# Altium PCB praline.PcbDoc (part 2 of 6)
Units mm, origin at the board's own origin, x right, y up, seen from the top; angles counter-clockwise.
Board outline 120 x 75 mm, 6 copper layers (F.Cu, In1.Cu, In2.Cu, In3.Cu, In4.Cu, B.Cu); 576 components, 429 nets, 2806 pads, 953 vias.
Unrouted connection lines stored in the file: 268.
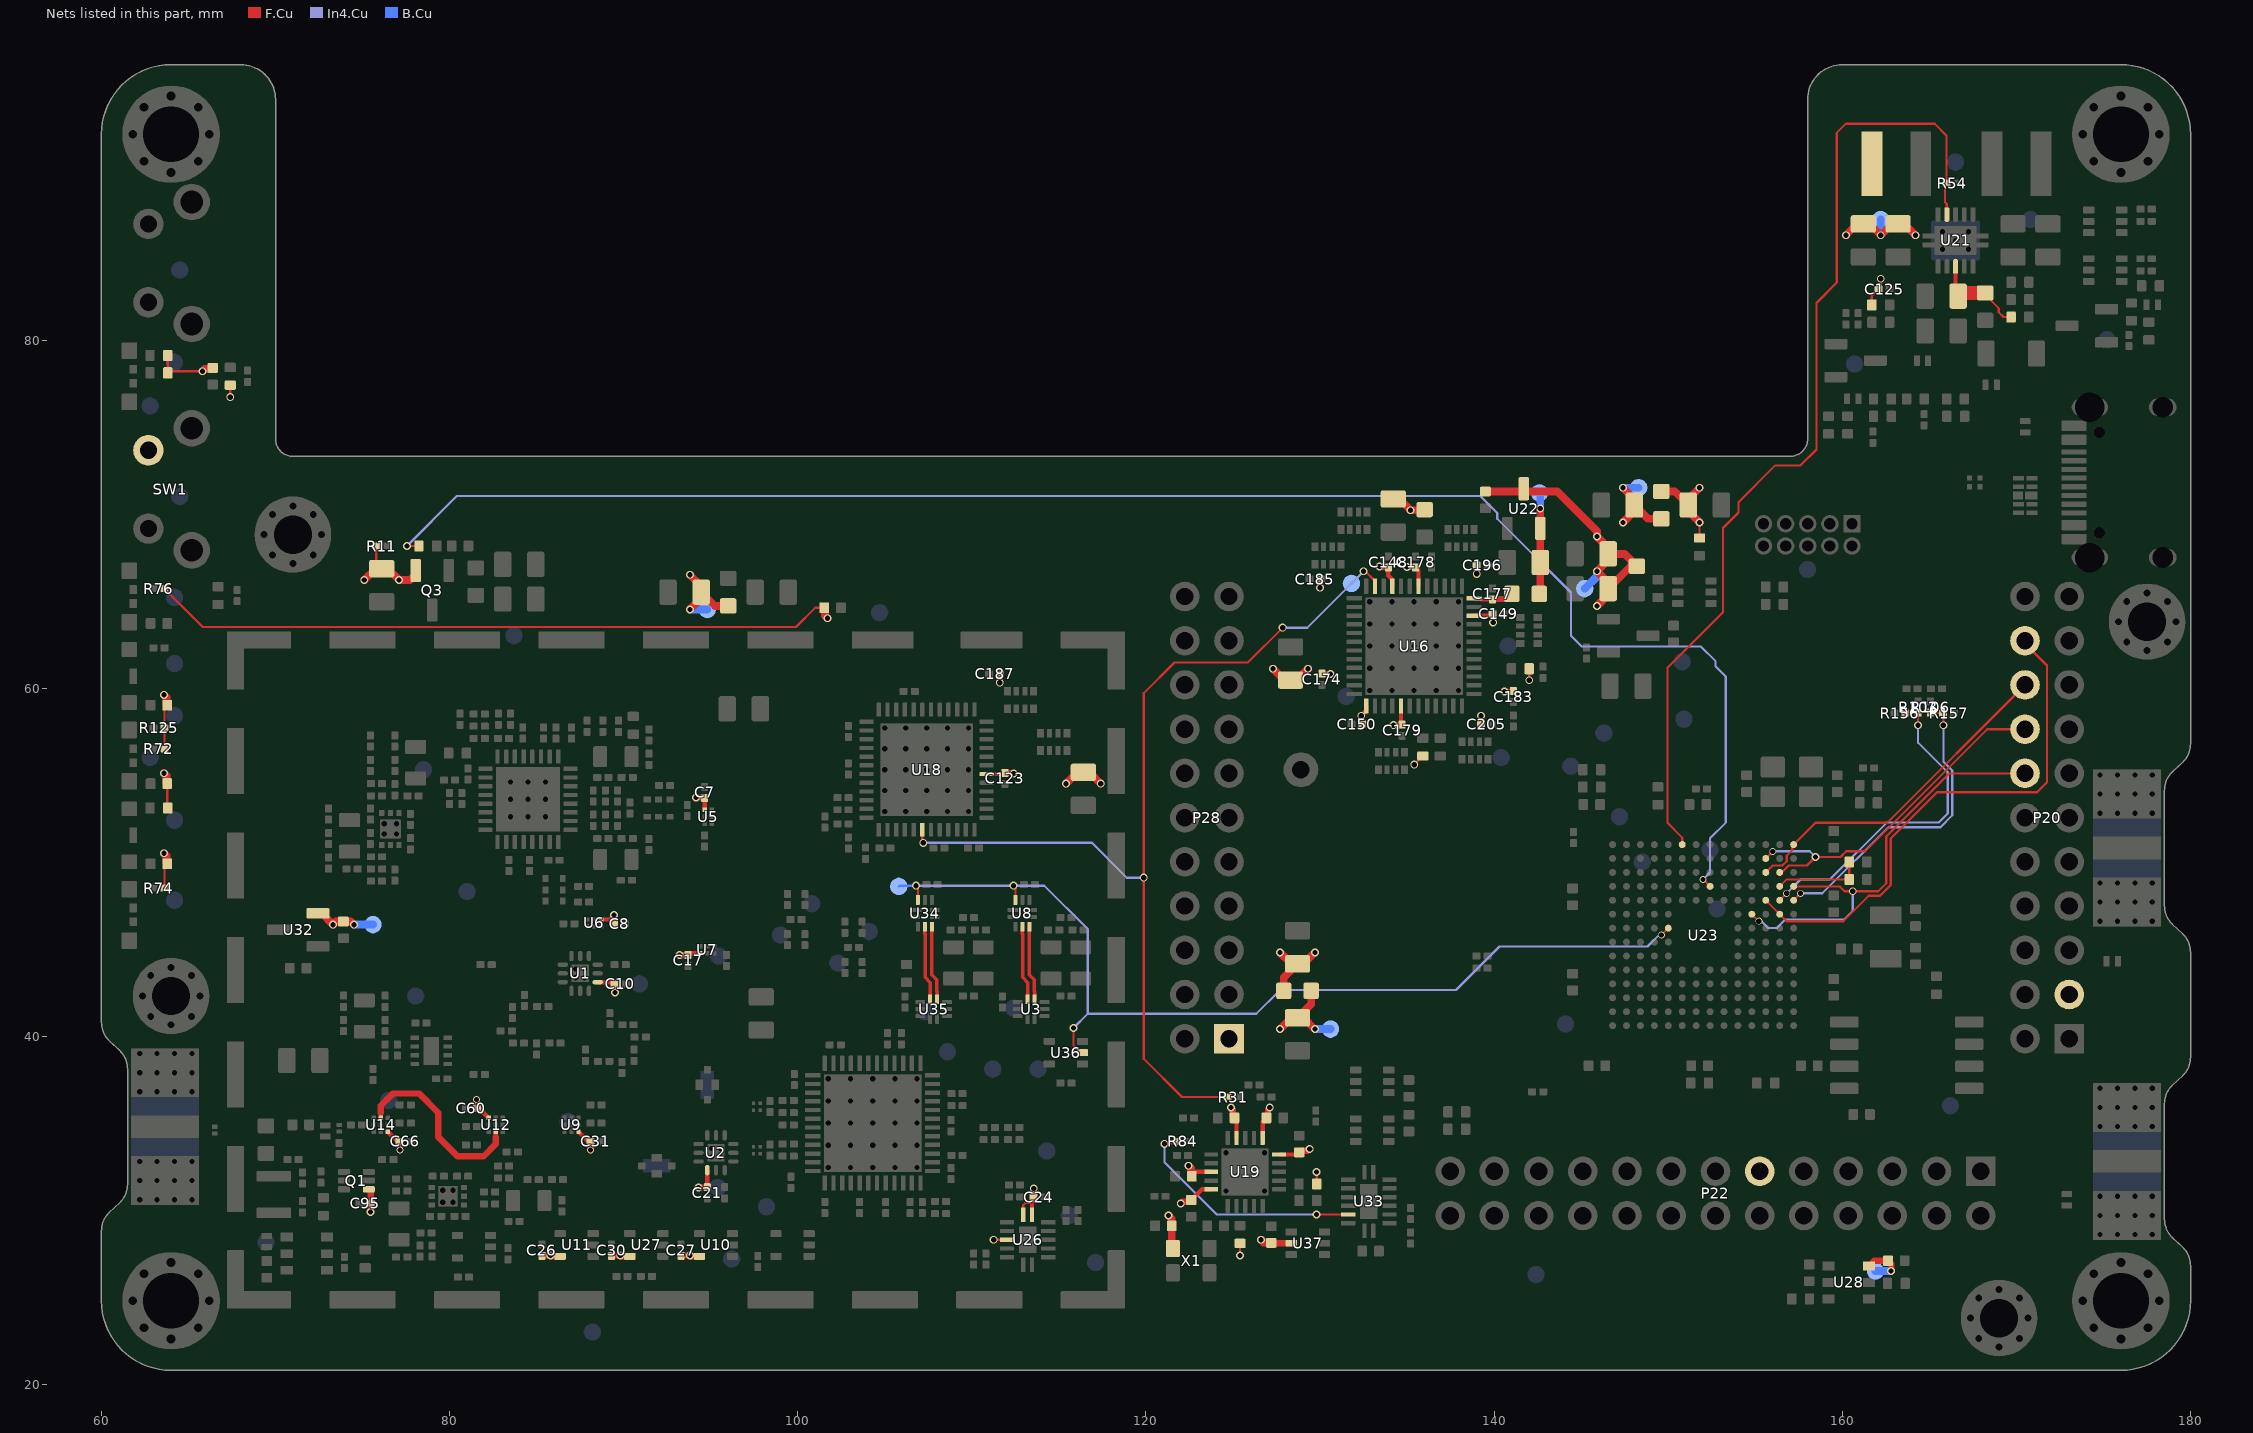
[diagram p6: the nets of this part, all layers, seen from the top]

## Components (designator, comment, footprint, x,y, rotation, side; value= is the part's Value field where it differs from the comment) (continued)
U24 "AP22652" TSOP-6_1.65x3.05mm_P0.95mm 71.8,27.52 r180 top
U25 "TRF37C73" WSON-8-1EP_2x2mm_P0.5mm_EP0.9x1.6mm 78.95,39.17 r180 top
U26 "74HC00" DHVQFN-14-1EP_2.5x3mm_P0.5mm_EP1x1.5mm 113.2,28.32 r0 top
U27 "74LVC1G32" SOT-353_SC-70-5 91.3,28.02 r180 top
U28 "AP22652" TSOP-6_1.65x3.05mm_P0.95mm 160.36,25.87 r0 top
U30 "74LVC1G3157" SOT-363_SC-70-6 133,37.42 r0 top
U31 "74LVC1G3157" SOT-363_SC-70-6 133,34.62 r0 top
U32 "LDO_2V5" SOT-23-3 71.3,46.12 r180 top
U33 "74HC4051" DHVQFN-16-1EP_2.5x3.5mm_P0.5mm_EP1x2mm 132.8,30.52 r180 top
U34 "GT4227" GTIC_UQFN-10_1.4x1.8mm_P0.4mm 107.3,47.07 r0 top
U35 "GT4227" GTIC_UQFN-10_1.4x1.8mm_P0.4mm 107.8,41.57 r90 top
U36 "74LVC1G86" SOT-353_SC-70-5 115.4,39.07 r180 top
U37 "74LVC1G3157" SOT-363_SC-70-6 129.3,28.12 r180 top
U38 "BGB741L7ESD" TSLP-7-1 76.6,51.92 r180 top
U39 "74LVC1G08" SOT-353_SC-70-5 99.7,28.02 r180 top
U40 "BGB741L7ESD" TSLP-7-1 79.9,30.82 r270 top
X1 "TCXO" Oscillator_SMD_SeikoEpson_TG2520SMN-xxx-xxxxxx-4Pin_2.5x2.0mm 122.6,27.12 r90 top
X2 "MCU_XTAL" Crystal_SMD_3225-4Pin_3.2x2.5mm 157.1,54.62 r270 top
X3 "RTC_XTAL" Crystal_SMD_3215-2Pin_3.2x1.5mm 162.5,45.72 r270 top

## Footprints (in the part's own frame and the unit in brackets; to place one, negate y for a bottom-side part, rotate by r counter-clockwise, add the part's x,y. Pads: shape width x height; smd on the part's side, far side on the other; paste and mask are expansions set on the pad)
Anaren_0805_2012Metric-6 [mm]
  rect 0.33x0.41 smd mask+0.05: 1(-0.495,0.65) 2(-0.495,0) 3(-0.495,-0.65) 4(0.495,-0.65) 5(0.495,0) 6(0.495,0.65)
  silkscreen extent -1.04,-1.12 0.64,1.4
Balun_TDK_TFSZ06052460-3310A2X [mm]
  rrect5% 0.18x0.2 smd mask+0.05: 1(-0.19,0.2) 2(-0.19,-0.2) 3(0.19,-0.2) 4(0.19,0.2)
  silkscreen extent -0.65,0.05 -0.45,0.45
C_0201_0603Metric [mm]
  rrect25% 0.46x0.4 smd paste-0.46 mask+0.05: 1(-0.32,0) 2(0.32,0)
  rrect25% 0.318x0.36 on Top Paste mask-0.36: Un1(-0.345,0) Un2(0.345,0)
C_0402_1005Metric [mm]
  rrect25% 0.56x0.62 smd mask+0.05: 1(-0.48,0) 2(0.48,0)
  silkscreen extent -0.11,-0.36 0.11,0.36
C_0805_2012Metric [mm]
  rrect25% 1x1.45 smd mask+0.05: 1(-0.95,0) 2(0.95,0)
  silkscreen extent -0.26,-0.73 0.26,0.73
Crystal_SMD_3215-2Pin_3.2x1.5mm [mm]
  rect 1x1.8 smd mask+0.05: 1(-1.25,0) 2(1.25,0)
  silkscreen extent -0.6,-0.87 0.6,0.87
Crystal_SMD_3225-4Pin_3.2x2.5mm [mm]
  rrect21% 1.2x1.4 smd mask+0.05: 1(-0.85,1.1) 2(-0.85,-1.1) 3(0.85,-1.1) 4(0.85,1.1)
  silkscreen extent -1.85,-0.25 1.4,1.8
D_SOD-123FL [mm]
  rrect25% 1x1.5 smd mask+0.05: 1(-1.45,0) 2(1.45,0)
  silkscreen extent -2.2,-1 1.65,1
DHVQFN-14-1EP_2.5x3mm_P0.5mm_EP1x1.5mm [mm]
  rrect25% 0.25x0.825 smd mask+0.05: 1(-0.25,1.438) 7(-0.25,-1.438) 8(0.25,-1.438) 14(0.25,1.438)
  rrect25% 0.825x0.25 smd mask+0.05: 2(-1.188,1) 3(-1.188,0.5) 4(-1.188,0) 5(-1.188,-0.5) 6(-1.188,-1) 9(1.188,-1) 10(1.188,-0.5) 11(1.188,0) 12(1.188,0.5) 13(1.188,1)
  rect 1x1.5 smd paste-1.5 mask+0.05: 15(0,0)
  rrect25% 0.81x1.21 on Top Paste mask-1.21: Un1(0,0)
  silkscreen extent -1.6,-1.61 1.36,1.94
DHVQFN-16-1EP_2.5x3.5mm_P0.5mm_EP1x2mm [mm]
  rrect25% 0.25x0.825 smd mask+0.05: 1(-0.25,1.687) 8(-0.25,-1.687) 9(0.25,-1.687) 16(0.25,1.687)
  rrect25% 0.825x0.25 smd mask+0.05: 2(-1.188,1.25) 3(-1.188,0.75) 4(-1.188,0.25) 5(-1.188,-0.25) 6(-1.188,-0.75) 7(-1.188,-1.25) 10(1.188,-1.25) 11(1.188,-0.75) 12(1.188,-0.25) 13(1.188,0.25) 14(1.188,0.75) 15(1.188,1.25)
  rect 1x2 smd paste-2 mask+0.05: 17(0,0)
  rrect25% 0.81x0.81 on Top Paste mask-0.81: Un1(0,0.5) Un2(0,-0.5)
  silkscreen extent -1.6,-1.86 1.36,2.19
Diodes_UDFN-10_1.0x2.5mm_P0.5mm [mm]
  rect 0.625x0.25 smd mask+0.05: 1(-0.387,1) 2(-0.387,0.5) 4(-0.387,-0.5) 5(-0.387,-1) 6(0.387,-1) 7(0.387,-0.5) 9(0.387,0.5) 10(0.387,1)
  rect 0.7x0.45 smd mask+0.05: 3(-0.35,0)
  rect 0.575x0.45 smd mask+0.05: 8(0.413,0)
  silkscreen extent -1.17,-1.36 0.5,1.59
Filter_Pulse_BPF1608LM09R5000A [mm]
  rrect12% 0.425x0.4 smd mask+0.05: 1(-0.863,0) 3(0.863,0)
  rect 1.6x0.8 smd far side paste-1.6 mask-1.6: 2(0,0)
  rrect12% 0.6x0.425 smd mask+0.05: 2(0,-0.463) 4(0,0.463)
  silkscreen extent -1.33,-0.93 0.9,0.5
GTIC_UQFN-10_1.4x1.8mm_P0.4mm [mm]
  rrect25% 0.663x0.225 smd mask+0.05: 1(-0.519,0.2)
  rrect25% 0.563x0.225 smd mask+0.05: 2(-0.569,-0.2) 6(0.569,-0.2) 7(0.569,0.2)
  rrect25% 0.225x0.563 smd mask+0.05: 3(-0.4,-0.768) 4(0,-0.768) 5(0.4,-0.768) 8(0.4,0.768) 9(0,0.768) 10(-0.4,0.768)
  silkscreen extent -1.14,-1.01 0.81,1.34
L_0201_0603Metric [mm]
  rrect25% 0.46x0.4 smd paste-0.46 mask+0.05: 1(-0.32,0) 2(0.32,0)
  rrect25% 0.318x0.36 on Top Paste mask-0.36: Un1(-0.345,0) Un2(0.345,0)
L_0603_1608Metric [mm]
  rrect25% 0.875x0.95 smd mask+0.05: 1(-0.787,0) 2(0.787,0)
  silkscreen extent -0.16,-0.51 0.16,0.51
L_CommonModeChoke_Murata_DLM0NS [mm]
  rrect5% 0.3x0.3 smd mask+0.05: 1(-0.3,0.25) 2(0.3,0.25) 3(-0.3,-0.25) 4(0.3,-0.25)
  silkscreen extent -0.85,-0.53 0.33,0.55
L_Taiyo-Yuden_A251818 [mm]
  rrect20% 0.6x2 smd mask+0.05: 1(-1.05,0) 2(1.05,0)
  silkscreen extent -0.55,-1 0.55,1
L_Taiyo-Yuden_NR-40xx [mm]
  rect 1.2x3.7 smd mask+0.05: 1(-1.4,0) 2(1.4,0)
  silkscreen extent -2,-2.1 2,2.1
L_TDK_MLZ2012_h1.25mm [mm]
  rrect20% 0.8x1.2 smd mask+0.05: 1(-0.9,0) 2(0.9,0)
  silkscreen extent -0.35,-0.7 0.35,0.7
Laird_Technologies_BMI-S-230-F_50.8x38.1mm [mm]
  rrect12% 1x3.35 smd mask+0.05: 1(-25.3,-17.775) 1(-25.3,17.775) 1(25.3,-17.775) 1(25.3,17.775)
  rrect12% 1x3.8 smd mask+0.05: 1(-25.3,-12) 1(-25.3,-6) 1(-25.3,0) 1(-25.3,6) 1(-25.3,12) 1(25.3,-12) 1(25.3,-6) 1(25.3,0) 1(25.3,6) 1(25.3,12)
  rrect12% 3.7x1 smd mask+0.05: 1(-23.95,-18.95) 1(-23.95,18.95) 1(23.95,-18.95) 1(23.95,18.95)
  rrect12% 3.8x1 smd mask+0.05: 1(-18,-18.95) 1(-18,18.95) 1(-12,-18.95) 1(-12,18.95) 1(-6,-18.95) 1(-6,18.95) 1(0,-18.95) 1(0,18.95) 1(6,-18.95) 1(6,18.95) 1(12,-18.95) 1(18,-18.95)
  rrect12% 3.55x1 smd mask+0.05: 1(11.875,18.95) 1(18.125,18.95)
  silkscreen extent -25.75,-19.2 25.55,20.05
LED_Dual_Xinglight_XL-3210_Horizontal [mm]
  rrect12% 0.5x0.44 smd mask+0.05: 1(0.4,-0.55) 2(-0.4,-0.55)
  rrect12% 0.95x0.88 smd mask+0.05: 3(1.475,-0.33) 4(-1.475,-0.33)
  silkscreen extent -2.15,-0.97 1.15,1.13
LED_Single_Xinglight_XL-3210_Horizontal [mm]
  rrect12% 0.85x0.88 smd mask+0.05: 1(-1.525,-0.33) 2(1.525,-0.33)
  rrect12% 0.9x0.44 smd mask+0.05: Un1(0,-0.55)
  silkscreen extent -2.15,-0.97 1.15,1.13
MountingHole_2.2mm_M2_Pad_Via [mm]
  round 0.7 hole 0.4 mask+0.05: 1(-1.65,0) 1(-1.167,-1.167) 1(-1.167,1.167) 1(0,-1.65) 1(0,1.65) 1(1.167,-1.167) 1(1.167,1.167) 1(1.65,0)
  round 4.4 hole 2.2 mask+0.05: 1(0,0)
MountingHole_3.2mm_M3_Pad_Via [mm]
  round 0.8 hole 0.5 mask+0.05: 1(-2.2,0) 1(-1.556,-1.556) 1(-1.556,1.556) 1(0,-2.2) 1(0,2.2) 1(1.556,-1.556) 1(1.556,1.556) 1(2.2,0)
  round 5.6 hole 3.2 mask+0.05: 1(0,0)
MXD8638C [mm]
  rrect12% 0.25x0.25 smd mask+0.05: 1(-0.4,0.4) 2(-0.4,0) 3(-0.4,-0.4) 4(0,-0.4) 5(0.4,-0.4) 6(0.4,0) 7(0.4,0.4) 8(0,0.4) 9(0,0)
  silkscreen extent -0.9,-0.65 0.65,0.7
Oscillator_SMD_SeikoEpson_TG2520SMN-xxx-xxxxxx-4Pin_2.5x2.0mm [mm]
  rrect25% 1x0.8 smd mask+0.05: 1(-0.7,1.05) 2(-0.7,-1.05) 3(0.7,-1.05) 4(0.7,1.05)
  silkscreen extent -1.6,-0.32 1.11,1.25
PinHeader_2x05_P1.27mm_Vertical [mm]
  rect 1x1 hole 0.65 mask+0.05: 1(0,0)
  round 1 hole 0.65 mask+0.05: 2(1.27,0) 3(0,-1.27) 4(1.27,-1.27) 5(0,-2.54) 6(1.27,-2.54) 7(0,-3.81) 8(1.27,-3.81) 9(0,-5.08) 10(1.27,-5.08)
  silkscreen extent -1.18,-5.82 2.45,0.81
PinSocket_2x11_P2.54mm_Vertical_Flipped [mm]
  rect 1.7x1.7 hole 1 mask+0.05: 1(0,0)
  round 1.7 hole 1 mask+0.05: 2(2.54,0) 3(0,-2.54) 4(2.54,-2.54) 5(0,-5.08) 6(2.54,-5.08) 7(0,-7.62) 8(2.54,-7.62) 9(0,-10.16) 10(2.54,-10.16) 11(0,-12.7) 12(2.54,-12.7) 13(0,-15.24) 14(2.54,-15.24) 15(0,-17.78) 16(2.54,-17.78) 17(0,-20.32) 18(2.54,-20.32) 19(0,-22.86) 20(2.54,-22.86) 21(0,-25.4) 22(2.54,-25.4)
  silkscreen extent -1.33,-26.73 3.87,1.33
PinSocket_2x13_P2.54mm_Vertical_Flipped [mm]
  rect 1.7x1.7 hole 1 mask+0.05: 1(0,0)
  round 1.7 hole 1 mask+0.05: 2(2.54,0) 3(0,-2.54) 4(2.54,-2.54) 5(0,-5.08) 6(2.54,-5.08) 7(0,-7.62) 8(2.54,-7.62) 9(0,-10.16) 10(2.54,-10.16) 11(0,-12.7) 12(2.54,-12.7) 13(0,-15.24) 14(2.54,-15.24) 15(0,-17.78) 16(2.54,-17.78) 17(0,-20.32) 18(2.54,-20.32) 19(0,-22.86) 20(2.54,-22.86) 21(0,-25.4) 22(2.54,-25.4) 23(0,-27.94) 24(2.54,-27.94) 25(0,-30.48) 26(2.54,-30.48)
  silkscreen extent -1.33,-31.81 3.87,1.33
QFN-12-1EP_2x2mm_P0.5mm_EP1x1mm [mm]
  rrect100% 0.6x0.25 smd mask+0.05: 1(-1,0.5) 2(-1,0) 3(-1,-0.5) 7(1,-0.5) 8(1,0) 9(1,0.5)
  rrect100% 0.25x0.6 smd mask+0.05: 4(-0.5,-1) 5(0,-1) 6(0.5,-1) 10(0.5,1) 11(0,1) 12(-0.5,1)
  round 0.4 hole 0.3 mask+0.05: 13(-0.25,0.25) 13(-0.25,-0.25) 13(0.25,0.25) 13(0.25,-0.25)
  rect 1x1 smd mask+0.05: 13(0,0)
  silkscreen extent -1.35,-1.1 1.1,1.2
QFN-20-1EP_4x4mm_P0.5mm_EP2.7x2.7mm_ThermalVias [mm]
  rrect25% 0.8x0.25 smd mask+0.05: 1(-1.95,1) 2(-1.95,0.5) 3(-1.95,0) 4(-1.95,-0.5) 5(-1.95,-1) 11(1.95,-1) 12(1.95,-0.5) 13(1.95,0) 14(1.95,0.5) 15(1.95,1)
  rrect25% 0.25x0.8 smd mask+0.05: 6(-1,-1.95) 7(-0.5,-1.95) 8(0,-1.95) 9(0.5,-1.95) 10(1,-1.95) 16(1,1.95) 17(0.5,1.95) 18(0,1.95) 19(-0.5,1.95) 20(-1,1.95)
  round 0.5 hole 0.3 mask+0.05: 21(-1.1,-1.1) 21(-1.1,1.1) 21(1.1,-1.1) 21(1.1,1.1)
  rect 2.7x2.7 smd paste-2.7 mask+0.05: 21(0,0)
  rect 2.7x2.7 smd far side paste-2.7 mask-2.7: 21(0,0)
  rrect21% 1.17x1.17 on Top Paste mask-1.17: Un1(-0.675,0.675) Un2(-0.675,-0.675) Un3(0.675,0.675) Un4(0.675,-0.675)
  silkscreen extent -2.35,-2.11 2.11,2.44
QFN-32-1EP_5x5mm_P0.5mm_EP3.7x3.7mm_ThermalVias [mm]
  rrect25% 0.8x0.25 smd mask+0.05: 1(-2.45,1.75) 2(-2.45,1.25) 3(-2.45,0.75) 4(-2.45,0.25) 5(-2.45,-0.25) 6(-2.45,-0.75) 7(-2.45,-1.25) 8(-2.45,-1.75) 17(2.45,-1.75) 18(2.45,-1.25) 19(2.45,-0.75) 20(2.45,-0.25) 21(2.45,0.25) 22(2.45,0.75) 23(2.45,1.25) 24(2.45,1.75)
  rrect25% 0.25x0.8 smd mask+0.05: 9(-1.75,-2.45) 10(-1.25,-2.45) 11(-0.75,-2.45) 12(-0.25,-2.45) 13(0.25,-2.45) 14(0.75,-2.45) 15(1.25,-2.45) 16(1.75,-2.45) 25(1.75,2.45) 26(1.25,2.45) 27(0.75,2.45) 28(0.25,2.45) 29(-0.25,2.45) 30(-0.75,2.45) 31(-1.25,2.45) 32(-1.75,2.45)
  round 0.5 hole 0.3 mask+0.05: 33(-1,1) 33(-1,0) 33(-1,-1) 33(0,1) 33(0,0) 33(0,-1) 33(1,1) 33(1,0) 33(1,-1)
  rect 3.7x3.7 smd paste-3.7 mask+0.05: 33(0,0)
  rect 2.5x2.5 smd far side paste-2.5 mask-2.5: 33(0,0)
  round 0.602 on Top Paste mask-0.602: Un1(-1.425,1.425) Un4(-1.425,-1.425) Un13(1.425,1.425) Un16(1.425,-1.425)
  round 0.612 on Top Paste mask-0.612: Un2(-1.425,0.5) Un3(-1.425,-0.5) Un5(-0.5,1.425) Un8(-0.5,-1.425) Un9(0.5,1.425) Un12(0.5,-1.425) Un14(1.425,0.5) Un15(1.425,-0.5)
  rrect25% 0.806x0.806 on Top Paste mask-0.806: Un6(-0.5,0.5) Un7(-0.5,-0.5) Un10(0.5,0.5) Un11(0.5,-0.5)
  silkscreen extent -2.85,-2.61 2.61,2.94
QFN-48-1EP_7x7mm_P0.5mm_EP5.3x5.3mm_ThermalVias [mm]
  rrect25% 0.8x0.25 smd mask+0.05: 1(-3.45,2.75) 2(-3.45,2.25) 3(-3.45,1.75) 4(-3.45,1.25) 5(-3.45,0.75) 6(-3.45,0.25) 7(-3.45,-0.25) 8(-3.45,-0.75) 9(-3.45,-1.25) 10(-3.45,-1.75) 11(-3.45,-2.25) 12(-3.45,-2.75) 25(3.45,-2.75) 26(3.45,-2.25) 27(3.45,-1.75) 28(3.45,-1.25) 29(3.45,-0.75) 30(3.45,-0.25) 31(3.45,0.25) 32(3.45,0.75) 33(3.45,1.25) 34(3.45,1.75) 35(3.45,2.25) 36(3.45,2.75)
  rrect25% 0.25x0.8 smd mask+0.05: 13(-2.75,-3.45) 14(-2.25,-3.45) 15(-1.75,-3.45) 16(-1.25,-3.45) 17(-0.75,-3.45) 18(-0.25,-3.45) 19(0.25,-3.45) 20(0.75,-3.45) 21(1.25,-3.45) 22(1.75,-3.45) 23(2.25,-3.45) 24(2.75,-3.45) 37(2.75,3.45) 38(2.25,3.45) 39(1.75,3.45) 40(1.25,3.45) 41(0.75,3.45) 42(0.25,3.45) 43(-0.25,3.45) 44(-0.75,3.45) 45(-1.25,3.45) 46(-1.75,3.45) 47(-2.25,3.45) 48(-2.75,3.45)
  round 0.5 hole 0.3 mask+0.05: 49(-2.4,-2.4) 49(-2.4,-1.2) 49(-2.4,0) 49(-2.4,1.2) 49(-2.4,2.4) 49(-1.2,2.4) 49(-1.2,-1.2) 49(-1.2,0) 49(-1.2,1.2) 49(-1.2,-2.4) 49(0,2.4) 49(0,1.2) 49(0,0) 49(0,-1.2) 49(0,-2.4) 49(1.2,2.4) 49(1.2,-1.2) 49(1.2,0) 49(1.2,1.2) 49(1.2,-2.4) 49(2.4,-2.4) 49(2.4,-1.2) 49(2.4,0) 49(2.4,1.2) 49(2.4,2.4)
  rect 5.3x5.3 smd paste-5.3 mask+0.05: 49(0,0)
  rect 5.3x5.3 smd far side paste-5.3 mask-5.3: 49(0,0)
  rrect24% 1.026x1.026 on Top Paste mask-1.026: Un1(-1.8,1.8) Un2(-1.8,0.6) Un3(-1.8,-0.6) Un4(-1.8,-1.8) Un5(-0.6,1.8) Un6(-0.6,0.6) Un7(-0.6,-0.6) Un8(-0.6,-1.8) Un9(0.6,1.8) Un10(0.6,0.6) Un11(0.6,-0.6) Un12(0.6,-1.8) Un13(1.8,1.8) Un14(1.8,0.6) Un15(1.8,-0.6) Un16(1.8,-1.8)
  silkscreen extent -3.85,-3.61 3.61,3.94
QFN-48-1EP_7x7mm_P0.5mm_EP5.6x5.6mm_ThermalVias [mm]
  rrect25% 0.875x0.25 smd mask+0.05: 1(-3.437,2.75) 2(-3.437,2.25) 3(-3.437,1.75) 4(-3.437,1.25) 5(-3.437,0.75) 6(-3.437,0.25) 7(-3.437,-0.25) 8(-3.437,-0.75) 9(-3.437,-1.25) 10(-3.437,-1.75) 11(-3.437,-2.25) 12(-3.437,-2.75) 25(3.437,-2.75) 26(3.437,-2.25) 27(3.437,-1.75) 28(3.437,-1.25) 29(3.437,-0.75) 30(3.437,-0.25) 31(3.437,0.25) 32(3.437,0.75) 33(3.437,1.25) 34(3.437,1.75) 35(3.437,2.25) 36(3.437,2.75)
  rrect25% 0.25x0.875 smd mask+0.05: 13(-2.75,-3.437) 14(-2.25,-3.437) 15(-1.75,-3.437) 16(-1.25,-3.437) 17(-0.75,-3.437) 18(-0.25,-3.437) 19(0.25,-3.437) 20(0.75,-3.437) 21(1.25,-3.437) 22(1.75,-3.437) 23(2.25,-3.437) 24(2.75,-3.437) 37(2.75,3.437) 38(2.25,3.437) 39(1.75,3.437) 40(1.25,3.437) 41(0.75,3.437) 42(0.25,3.437) 43(-0.25,3.437) 44(-0.75,3.437) 45(-1.25,3.437) 46(-1.75,3.437) 47(-2.25,3.437) 48(-2.75,3.437)
  round 0.5 hole 0.3 mask+0.05: 49(-2.55,-2.55) 49(-2.55,-1.275) 49(-2.55,0) 49(-2.55,1.275) 49(-2.55,2.55) 49(-1.275,2.55) 49(-1.275,-1.275) 49(-1.275,0) 49(-1.275,1.275) 49(-1.275,-2.55) 49(0,2.55) 49(0,1.275) 49(0,0) 49(0,-1.275) 49(0,-2.55) 49(1.275,2.55) 49(1.275,-1.275) 49(1.275,0) 49(1.275,1.275) 49(1.275,-2.55) 49(2.55,-2.55) 49(2.55,-1.275) 49(2.55,0) 49(2.55,1.275) 49(2.55,2.55)
  rect 5.6x5.6 smd paste-5.6 mask+0.05: 49(0,0)
  rect 5.6x5.6 smd far side paste-5.6 mask-5.6: 49(0,0)
  rrect23% 1.084x1.084 on Top Paste mask-1.084: Un1(-1.913,1.913) Un2(-1.913,0.637) Un3(-1.913,-0.637) Un4(-1.913,-1.913) Un5(-0.637,1.913) Un6(-0.637,0.637) Un7(-0.637,-0.637) Un8(-0.637,-1.913) Un9(0.637,1.913) Un10(0.637,0.637) Un11(0.637,-0.637) Un12(0.637,-1.913) Un13(1.913,1.913) Un14(1.913,0.637) Un15(1.913,-0.637) Un16(1.913,-1.913)
  silkscreen extent -3.85,-3.61 3.61,3.94
R_0201_0603Metric [mm]
  rrect25% 0.46x0.4 smd paste-0.46 mask+0.05: 1(-0.32,0) 2(0.32,0)
  rrect25% 0.318x0.36 on Top Paste mask-0.36: Un1(-0.345,0) Un2(0.345,0)
R_0402_1005Metric [mm]
  rrect25% 0.54x0.64 smd mask+0.05: 1(-0.51,0) 2(0.51,0)
  silkscreen extent -0.15,-0.38 0.15,0.38
R_Array_Convex_4x0402 [mm]
  rect 0.5x0.4 smd mask+0.05: 1(-0.5,0.75) 4(-0.5,-0.75) 5(0.5,-0.75) 8(0.5,0.75)
  rect 0.5x0.3 smd mask+0.05: 2(-0.5,0.25) 3(-0.5,-0.25) 6(0.5,-0.25) 7(0.5,0.25)
  silkscreen extent -0.25,-1.18 0.25,1.18
SMA_MyAntenna_A-SMA-KE-16.5A_EdgeMount [mm]
  rect 3.9x1.3 smd paste-3.9 mask+0.05: 1(2.15,0)
  round 0.45 hole 0.3 mask+0.05: 2(0.7,4.2) 2(0.7,3.1) 2(0.7,2) 2(0.7,-2) 2(0.7,-3.1) 2(0.7,-4.2) 2(1.7,2) 2(1.7,3.1) 2(1.7,4.2) 2(1.7,-4.2) 2(1.7,-3.1) 2(1.7,-2) 2(2.7,2) 2(2.7,3.1) 2(2.7,4.2) 2(2.7,-4.2) 2(2.7,-3.1) 2(2.7,-2) 2(3.7,3.1) 2(3.7,4.2) 2(3.7,-2) 2(3.7,2) 2(3.7,-4.2) 2(3.7,-3.1)
  rect 3.9x2.8 smd paste-3.9 mask+0.05: 2(2.15,3.1) 2(2.15,-3.1)
  rect 3.9x2.8 smd far side paste-3.9 mask+0.05: 2(2.15,3.1) 2(2.15,-3.1)
  rect 3.9x9 smd far side paste-9 mask-9: 2(2.15,0)
SOIC-8_5.3x5.3mm_P1.27mm [mm]
  rrect25% 1.625x0.65 smd mask+0.05: 1(-3.588,1.905) 2(-3.588,0.635) 3(-3.588,-0.635) 4(-3.588,-1.905) 5(3.588,-1.905) 6(3.588,-0.635) 7(3.588,0.635) 8(3.588,1.905)
  silkscreen extent -3.76,-2.76 2.76,2.82
SOT-23-3 [mm]
  rrect25% 1.325x0.6 smd mask+0.05: 1(-1.138,0.95) 2(-1.138,-0.95) 3(1.138,0)
  silkscreen extent -1.54,-1.56 0.8,1.84
SOT-353_SC-70-5 [mm]
  rrect25% 0.65x0.4 smd mask+0.05: 1(-0.95,0.65) 2(-0.95,0) 3(-0.95,-0.65) 4(0.95,-0.65) 5(0.95,0.65)
  silkscreen extent -1.32,-1.16 0.7,1.44
SOT-363_SC-70-6 [mm]
  rrect25% 0.65x0.4 smd mask+0.05: 1(-0.95,0.65) 2(-0.95,0) 3(-0.95,-0.65) 4(0.95,-0.65) 5(0.95,0) 6(0.95,0.65)
  silkscreen extent -1.32,-1.16 0.7,1.44
SOT-563 [mm]
  rrect25% 0.675x0.35 smd mask+0.05: 1(-0.713,0.5) 2(-0.713,0) 3(-0.713,-0.5) 4(0.713,-0.5) 5(0.713,0) 6(0.713,0.5)
  silkscreen extent -1.64,-0.93 0.6,0.93
SW_Tactile_SPST_Angled_PTS645Vx58-2LFS [mm]
  round 1.75 hole 0.99 mask+0.05: 1(0,0) 2(4.5,0)
  round 2.1 hole 1.3 mask+0.05: SH(-1.25,-2.49) SH(5.76,-2.49)
  silkscreen extent -1.61,-4.31 6.11,0.9
TestPoint_Loop_D1.80mm_Drill1.0mm_Beaded [mm]
  round 2 hole 1 mask+0.05: 1(0,0)
  silkscreen extent -1.5,-1.5 1.5,1.5
TestPoint_Pad_D1.0mm [mm]
  round 1 smd paste-1 mask+0.05: 1(0,0)
  silkscreen extent -0.7,-0.7 0.7,0.7
Texas_S-PVSON-N10_ThermalVias [mm]
  rrect25% 0.28x0.28 smd paste-0.025 mask+0.05: 1(-1.76,1) 2(-1.76,0.5) 3(-1.76,0) 4(-1.76,-0.5) 5(-1.76,-1) 6(1.76,-1) 7(1.76,-0.5) 8(1.76,0) 9(1.76,0.5) 10(1.76,1)
  rrect100% 0.85x0.28 smd paste-0.025 mask+0.05: 1(-1.475,1) 2(-1.475,0.5) 3(-1.475,0) 4(-1.475,-0.5) 5(-1.475,-1) 6(1.475,-1) 7(1.475,-0.5) 8(1.475,0) 9(1.475,0.5) 10(1.475,1)
  round 0.6 hole 0.3 mask+0.05: 11(-0.5,0.75) 11(-0.5,-0.75) 11(0,0) 11(0.5,0.75) 11(0.5,-0.75)
  rect 0.68x1.05 smd mask+0.05: 11(-0.45,-0.635) 11(-0.45,0.635) 11(0.45,-0.635) 11(0.45,0.635)
  rrect25% 0.28x0.8 smd paste-0.8 mask+0.05: 11(-0.25,1.5) 11(-0.25,-1.5) 11(0.25,1.5) 11(0.25,-1.5)
  rect 0.26x0.5 smd mask+0.05: 11(-0.25,1.6) 11(-0.25,-1.6) 11(0.25,1.6) 11(0.25,-1.6)
  rrect5% 1.65x2.4 smd paste-2.4 mask+0.05: 11(0,0)
  rrect10% 2.3x2.8 smd far side paste-2.8 mask-2.8: 11(0,0)
  silkscreen extent -2.08,-1.63 1.63,1.75
TFBGA-180_12x12mm_Layout14x14_P0.8mm [mm]
  round 0.4 smd mask+0.05: A1(-5.2,5.2) A2(-4.4,5.2) A3(-3.6,5.2) A4(-2.8,5.2) A5(-2,5.2) A6(-1.2,5.2) A7(-0.4,5.2) A8(0.4,5.2) A9(1.2,5.2) A10(2,5.2) A11(2.8,5.2) A12(3.6,5.2) A13(4.4,5.2) A14(5.2,5.2) B1(-5.2,4.4) B2(-4.4,4.4) B3(-3.6,4.4) B4(-2.8,4.4) B5(-2,4.4) B6(-1.2,4.4) B7(-0.4,4.4) B8(0.4,4.4) B9(1.2,4.4) B10(2,4.4) B11(2.8,4.4) B12(3.6,4.4) B13(4.4,4.4) B14(5.2,4.4) C1(-5.2,3.6) C2(-4.4,3.6) C3(-3.6,3.6) C4(-2.8,3.6) C5(-2,3.6) C6(-1.2,3.6) C7(-0.4,3.6) C8(0.4,3.6) C9(1.2,3.6) C10(2,3.6) C11(2.8,3.6) C12(3.6,3.6) C13(4.4,3.6) C14(5.2,3.6) D1(-5.2,2.8) D2(-4.4,2.8) D3(-3.6,2.8) D4(-2.8,2.8) D5(-2,2.8) D6(-1.2,2.8) D7(-0.4,2.8) D8(0.4,2.8) D9(1.2,2.8) D10(2,2.8) D11(2.8,2.8) D12(3.6,2.8) D13(4.4,2.8) D14(5.2,2.8) E1(-5.2,2) E2(-4.4,2) E3(-3.6,2) E4(-2.8,2) E5(-2,2) E6(-1.2,2) E7(-0.4,2) E8(0.4,2) E9(1.2,2) E10(2,2) E11(2.8,2) E12(3.6,2) E13(4.4,2) E14(5.2,2) F1(-5.2,1.2) F2(-4.4,1.2) F3(-3.6,1.2) F4(-2.8,1.2) F5(-2,1.2) F10(2,1.2) F11(2.8,1.2) F12(3.6,1.2) F13(4.4,1.2) F14(5.2,1.2) G1(-5.2,0.4) G2(-4.4,0.4) G3(-3.6,0.4) G4(-2.8,0.4) G5(-2,0.4) G10(2,0.4) G11(2.8,0.4) G12(3.6,0.4) G13(4.4,0.4) G14(5.2,0.4) H1(-5.2,-0.4) H2(-4.4,-0.4) H3(-3.6,-0.4) H4(-2.8,-0.4) H5(-2,-0.4) H10(2,-0.4) H11(2.8,-0.4) H12(3.6,-0.4) H13(4.4,-0.4) H14(5.2,-0.4) J1(-5.2,-1.2) J2(-4.4,-1.2) J3(-3.6,-1.2) J4(-2.8,-1.2) J5(-2,-1.2) J10(2,-1.2) J11(2.8,-1.2) J12(3.6,-1.2) J13(4.4,-1.2) J14(5.2,-1.2) K1(-5.2,-2) K2(-4.4,-2) K3(-3.6,-2) K4(-2.8,-2) K5(-2,-2) K6(-1.2,-2) K7(-0.4,-2) K8(0.4,-2) K9(1.2,-2) K10(2,-2) K11(2.8,-2) K12(3.6,-2) K13(4.4,-2) K14(5.2,-2) L1(-5.2,-2.8) L2(-4.4,-2.8) L3(-3.6,-2.8) L4(-2.8,-2.8) L5(-2,-2.8) L6(-1.2,-2.8) L7(-0.4,-2.8) L8(0.4,-2.8) L9(1.2,-2.8) L10(2,-2.8) L11(2.8,-2.8) L12(3.6,-2.8) L13(4.4,-2.8) L14(5.2,-2.8) M1(-5.2,-3.6) M2(-4.4,-3.6) M3(-3.6,-3.6) M4(-2.8,-3.6) M5(-2,-3.6) M6(-1.2,-3.6) M7(-0.4,-3.6) M8(0.4,-3.6) M9(1.2,-3.6) M10(2,-3.6) M11(2.8,-3.6) M12(3.6,-3.6) M13(4.4,-3.6) M14(5.2,-3.6) N1(-5.2,-4.4) N2(-4.4,-4.4) N3(-3.6,-4.4) N4(-2.8,-4.4) N5(-2,-4.4) N6(-1.2,-4.4) N7(-0.4,-4.4) N8(0.4,-4.4) N9(1.2,-4.4) N10(2,-4.4) N11(2.8,-4.4) N12(3.6,-4.4) N13(4.4,-4.4) N14(5.2,-4.4) P1(-5.2,-5.2) P2(-4.4,-5.2) P3(-3.6,-5.2) P4(-2.8,-5.2) P5(-2,-5.2) P6(-1.2,-5.2) P7(-0.4,-5.2) P8(0.4,-5.2) P9(1.2,-5.2) P10(2,-5.2) P11(2.8,-5.2) P12(3.6,-5.2) P13(4.4,-5.2) P14(5.2,-5.2)
  silkscreen extent -6.5,-6.12 6.12,6.5
TSLP-2-19 [mm]
  rrect12% 0.35x0.6 smd paste-0.6 mask+0.05: 1(-0.325,0) 2(0.325,0)
  rect 0.28x0.45 on Top Paste paste-0.05 mask-0.45: Un1(-0.33,0) Un2(0.33,0)
  silkscreen extent -0.65,-0.45 -0.25,0.45
TSLP-6-4_1.1x0.7mm_P0.4mm [mm]
  rrect12% 0.25x0.25 smd mask+0.05: 1(-0.2,0.4) 2(-0.2,0) 3(-0.2,-0.4) 4(0.2,-0.4) 5(0.2,0) 6(0.2,0.4)
  silkscreen extent -0.73,-0.65 0.45,0.93
TSLP-7-1 [mm]
  rrect12% 0.3x0.35 smd mask+0.05: 1(-0.5,-0.925) 2(0,-0.925) 3(0.5,-0.925) 4(0.5,0.925) 5(0,0.925) 6(-0.5,0.925)
  rrect37% 0.3x0.3 smd mask-0.3: 7(-0.45,0.4) 7(-0.45,-0.4) 7(0.45,0.4) 7(0.45,-0.4)
  rect 0.3x0.3 smd mask-0.3: 7(-0.45,0) 7(0,0.4) 7(0,0) 7(0,-0.4) 7(0.45,0)
  round 0.4 hole 0.3 mask+0.05: 7(-0.35,0.3) 7(-0.35,-0.3) 7(0.35,0.3) 7(0.35,-0.3)
  rrect10% 1.2x1.1 smd paste-1.2 mask+0.05: 7(0,0)
  rrect10% 1.2x1.1 smd far side paste-1.2 mask-1.2: 7(0,0)
  silkscreen extent -0.96,-1.48 0.8,1
TSOP-6_1.65x3.05mm_P0.95mm [mm]
  rect 0.7x0.51 smd mask+0.05: 1(-1.16,0.95) 2(-1.16,0) 3(-1.16,-0.95) 4(1.16,-0.95) 5(1.16,0) 6(1.16,0.95)
  silkscreen extent -1.49,-1.6 0.8,1.78
TSSLP-2-1 [mm]
  rrect12% 0.24x0.32 smd paste-0.32 mask+0.05: 1(-0.19,0) 2(0.19,0)
  rrect50% 0.19x0.27 on Top Paste paste-0.05 mask-0.27: Un1(-0.19,0) Un2(0.19,0)
  silkscreen extent -0.45,-0.3 -0.15,0.3
USB_C_Receptacle_HRO_TYPE-C-31-M-12 [mm]
  rrect25% 0.6x1.45 smd mask+0.05: A1(-3.25,4.045) A4(-2.45,4.045) A9(2.45,4.045) A12(3.25,4.045) B1(3.25,4.045) B4(2.45,4.045) B9(-2.45,4.045) B12(-3.25,4.045)
  rrect25% 0.3x1.45 smd mask+0.05: A5(-1.25,4.045) A6(-0.25,4.045) A7(0.25,4.045) A8(1.25,4.045) B5(1.75,4.045) B6(0.75,4.045) B7(-0.75,4.045) B8(-1.75,4.045)
  rrect100% 1x1.6 hole 1.2 slot 0.6 at 0 deg paste-2539.97 mask+0.05: S1(-4.32,-1.05) S1(4.32,-1.05)
  rrect100% 1x2.1 hole 1.7 slot 0.6 at 0 deg paste-2539.97 mask+0.05: S1(-4.32,3.13) S1(4.32,3.13)
  round 0.65 hole 0.65 mask+0.05: Un1(-2.89,2.6) Un2(2.89,2.6)
  silkscreen extent -4.7,-2.45 4.7,1.9
WSON-8-1EP_2x2mm_P0.5mm_EP0.9x1.6mm [mm]
  rrect25% 0.5x0.25 smd mask+0.05: 1(-0.95,0.75) 2(-0.95,0.25) 3(-0.95,-0.25) 4(-0.95,-0.75) 5(0.95,-0.75) 6(0.95,-0.25) 7(0.95,0.25) 8(0.95,0.75)
  rect 0.9x1.6 smd paste-1.6 mask+0.05: 9(0,0)
  rect 0.75x0.65 on Top Paste mask-0.75: Un1(0,0.4) Un2(0,-0.4)
  silkscreen extent -1.65,-1.14 1,1.35

## Part data
C1 C2 C3 C5 C7 C8 C10 C17 C21 C24 C25 C26 C27 C28 C30 C31 C41 C42 C46 C48 C49 C50 C52 C53 C58 C59 C60 C62 C66 C68 C69 C71 C72 C73 C75 C77 C78 C79 C82 C83 C84 C85 C86 C87 C88 C89 C90 C92 C93 C94 C95 C97 C98 C100 C106 C123 C139 C141 C142 C148 C149 C150 C156 C159 C160 C161 C174 C176 C177 C178 C179 C183 C185 C187 C189 C190 C191 C192 C193 C194 C195 C196 C202 C203 C205 C206 C207 C208 C210 C211 C212: library part C, Manufacturer=Murata, Part Number=GRM033R61A105ME44D
  C1 C2 C3 C5 C7 C8 C10 C17 C21 C24 C25 C26 C27 C28 C30 C31 C41 C42 C46 C48 C49 C50 C52 C53 C58 C59 C60 C62 C66 C68 C69 C71 C72 C73 C75 C77 C78 C79 C82 C83 C84 C85 C86 C87 C88 C89 C90 C92 C93 C94 C95 C97 C98 C100 C106 C123 C139 C141 C142 C148 C149 C150 C156 C159 C160 C161 C174 C176 C177 C178 C179 C183 C185 C187 C189 C190 C191 C192 C193 C194 C195 C196 C205 C206 C207 C208 C210 C211 C212: Substitution="GRM033R61A105ME44*, GRM033R61C105ME15*, Samsung CL03A105MO3NRN*"
  C202: Substitution=GRM033R71A222KA01*
  C203: Substitution=GRM0335C1H8R2*
C4 C6 C9 C11 C16 C18 C19 C20 C29 C55 C57 C63 C65: library part C, Manufacturer=Murata, Part Number=GRM033R71A332KA01D, Substitution=GRM033R71A332K*
C12 C13 C151 C152: library part C, Manufacturer=Murata, Part Number=GRM0335C1E331JA01D, Substitution="GRM0335C1E331*, GRM0335C1H331*"
C14: library part C, Manufacturer=Murata, Part Number=GRM0335C1H8R2CA01D, Substitution=GRM0335C1H8R2*
C15 C74 C76 C107 C108: library part C, Manufacturer=Murata, Part Number=GRM0335C1H181JA01D, Substitution=GRM0335C1H181*
C22 C23 C32 C33 C39 C40 C43 C64 C80 C81 C110 C113 C119 C120 C121 C122 C124 C128 C129 C130 C131 C132 C133 C134 C135 C136 C137 C138 C140 C144 C162 C168 C171 C173 C199: library part C, Manufacturer=Samsung, Part Number=CL05A105KA5NQNC, Substitution="Murata GRM155R61E105KA12D"
C34 C35 C36 C37 C67 C109 C125: library part C, Manufacturer=Murata, Part Number=GRM0335C1H330JA01D, Substitution="GRM0335C1H330*, GRM0335C1E330*"
C44 C70 C112: library part C, Manufacturer=Murata, Part Number=GRM0335C1E101JA01D, Substitution="GRM0335C1E101JA01*, GRM0335C1H101JA01*"
C45: library part C, Manufacturer=Murata, Part Number=GRM033R71A222KA01D, Substitution=GRM033R71A222KA01*
C47: library part C, Manufacturer=Murata, Part Number=GRM0335C1H680JA01D, Substitution=GRM0335C1H680JA01*
C51 C61 C101 C103: library part C, Manufacturer=Murata, Part Number=GRM0335C1ER70WA01D, Tolerance=±0.05, Substitution="GRM0335C1HR70W*, GRM0335C1ER70W*"
C54 C56: library part C, Manufacturer=Murata, Part Number=GRM0335C1E1R8WA01D, Tolerance=±0.05, Substitution="GRM0335C1H1R8W*, GRM0335C1E1R8W*"
C91 C96: library part C, Manufacturer=Murata, Part Number=GRM0335C1E1R6WA01D, Tolerance=±0.05, Substitution="GRM0335C1H1R6W*, GRM0335C1E1R6W*"
C99 C102 C115: library part C, Manufacturer=Murata, Part Number=GRM0335C1H220JA01D, Substitution=GRM0335C1H220*
C104 C111: library part C, Manufacturer=Murata, Part Number=GRM0335C1E4R3CA01D, Substitution="GRM0335C1E4R3*, GRM0335C1H4R3*"
C105 C117 C126 C127 C145 C146 C154 C163 C165 C166 C167 C169 C170 C172 C175 C181 C182 C184 C186 C197 C200 C201 C204: library part C, Manufacturer=Samsung, Part Number=CL21A106KOQNNNE
  C105 C126 C127 C145 C146 C154 C163 C165 C166 C167 C169 C170 C172 C175 C181 C182 C184 C186 C197 C200 C201 C204: Substitution="Murata GRM21BR61A106KE19L"
  C117: Substitution="Murata GRM155R61E105KA12D"
C114 C188 C209: library part C, Manufacturer=Murata, Part Number=GRM0335C1ER30BA01D, Substitution="GRM0335C1*R30*A01*, GRM0335C2*R30*A01*"
C116: library part C, Manufacturer=Murata, Part Number=GRM0335C1E470JA01D, Substitution="GRM0335C1E470JA01*, GRM0335C1H470JA01*"
C118 C157 C158 C164: library part C, Manufacturer=Samsung, Part Number=CL05C180JB5NNNC, Substitution="Murata GRM1555C1H180JA01D"
C143 C147: library part C, Manufacturer=Samsung, Part Number=CL21A226MAYNNNE, Substitution="Murata GRM21BR61A106KE19L"
C153 C155 C180: library part C, Manufacturer=Samsung, Part Number=CL05A104KA5NNNC, Substitution="Murata GRM155R61A104KA01D"
C198: library part C, Manufacturer=Murata, Part Number=GRM0335C1ER70WA01D, Substitution="GRM0335C1HR70W*, GRM0335C1ER70W*"
D1: library part D_TVS, Manufacturer=Nexperia, Part Number=PESD5V0H1BSFYL, Substitution=PESD5V0H1BSF
D2: Manufacturer=Xinglight, Part Number=XL-3210UGC, Sim.Pins="1=K 2=A"
D3 D9: library part D_Zener, Manufacturer=Slkor, Part Number=SLESD0301L
D4: library part LED_Dual_AKAK, Manufacturer=Xinglight, Part Number=XL-3210SURSYGC
D5: Manufacturer=Xinglight, Part Number=XL-3210UOC, Sim.Pins="1=K 2=A"
D6 D7 D8: library part LED_Dual_AKAK, Manufacturer=Xinglight, Part Number=XL-3210SURUBC
D10: library part D_Schottky, Manufacturer=Nexperia, Part Number=PMEG4010ESBYL
D11: library part D_Zener, Manufacturer=Nexperia, Part Number=BZX884-B6V2,315, Tolerance=±2%
D12: Manufacturer="Yangzhou Yangjie", Part Number=U1D
D13: library part D, Manufacturer=Yageo, Part Number=RC0201JR-070RL
D14: library part D, Manufacturer=Infineon, Part Number=BAR9002ELE6327XTMA1
D15: library part D_Schottky, Manufacturer=Toshiba, Part Number=JDH2S02SL,L3F
D16 D17: library part D_Zener, Manufacturer=Nexperia, Part Number=BZX884-B5V6,315, Tolerance=±2%
D18: library part D_Zener, Manufacturer=MDD, Part Number=ESD8D12V
FB1 FB2 FB3 FB4 FB5 FB6 FB7 FB8: library part FerriteBead, Manufacturer=TAI-TECH, Part Number=HCB1608KF-102T10, Substitution="Murata BLM18KG102SN1*"
FL1: library part Filter_EMI_CommonMode, Manufacturer=Murata, Part Number=DLM0NSB280HY2D
FL2 FL3: library part BFCN-1445, Manufacturer="Pulse Electronics", Part Number=BPF1608LM02R2400A
J1: library part USB_C_Receptacle_USB2.0_16P, Manufacturer=DEALON, Part Number=USB-TYPE-C-019, Substitution="Yuandi TYPE-611A-T3"
J3: library part RFShield_TwoPieces, Manufacturer="TE Connectivity", Part Number=2118732-2, Note="use with shield 2118731-2"
L1 L7: library part L
L2 L4 L5 L21 L22 L23 L24 L26 L27 L29 L33: library part L, Manufacturer=TDK, Part Number=MLZ2012N101LT000, Substitution=MLZ2012N101LTD25
L3 L12 L30 L31 L32: library part L, Manufacturer=Murata, Part Number=LQP03TN56NJ02D, Substitution=LQP03TN56NH02D
L6: library part L, Manufacturer=Murata, Part Number=LQP03TN5N6H02D
L8 L15: library part L, Manufacturer=Murata, Part Number=LQP03TN4N7H02D, Tolerance=±3%
L9: library part L, Manufacturer=Murata, Part Number=LQP03TN10NJ02D, Substitution=LQP03TN10NH02D
L10 L11: library part L, Manufacturer="Taiyo Yuden", Part Number=LSXND4040TKL4R7MDG, Substitution="NRS4018T4R7MDGJ, LLXND4040TKL4R7MDG, NRS4018T4R7MDGJ"
L13: library part L, Manufacturer="Taiyo Yuden", Part Number=LSQPB160807T2R2M, Substitution="BRL1608T2R2M, LLQPB160807T2R2M"
L14: library part L, Manufacturer=Murata, Part Number=LQP03TN5N6H02D, Tolerance=±3%
L16 L17: library part L, Manufacturer=Murata, Part Number=LQP03HQ1N8W02D, Tolerance=±0.05
L18: library part L, Manufacturer=Murata, Part Number=LQP03HQ1N6W02D, Tolerance=±0.05
L19: library part L, Manufacturer="Taiyo Yuden", Part Number=LSQEA251818T470M, Substitution="LSQEA251818T470K, LBR2518T470M, LBR2518T470K"
L28: library part L, Manufacturer=Murata, Part Number=LQP03TN18NJ02D, Substitution=LQP03TN56NH02D
L34: library part L, Manufacturer=Murata, Part Number=LQP03TN33NJ02D, Substitution=LQP03TN56NH02D
P1 P2 P3: library part GSG-RF-CONN, Manufacturer=MyAntenna, Part Number=A-SMA-KE-16.5A, Substitution=M04-0102170R0A
P20 P28: library part Conn_02x11_Odd_Even, Manufacturer=Sullins, Part Number=PPPC112LFBN-RC
P22: library part Conn_02x13_Odd_Even, Manufacturer=Sullins, Part Number=PPPC132LFBN-RC
P26: library part Conn_02x05_Odd_Even, Manufacturer=Sullins, Part Number=GRPB052VWVN-RC
Q1: library part Q_Dual_NMOS_PMOS_S1G1D2S2G2D1, Manufacturer="Diodes Inc.", Part Number=DMC2400UV-7, Substitution=DMC2400UV*
Q3 Q4 Q5 Q6: library part Q_PMOS_GSD, Manufacturer="Yangzhou Yangjie", Part Number=YJL3401A, Substitution="Alpha & Omega AO3401A"
Q7 Q10: library part BC847BS, Manufacturer="Yangzhou Yangjie", Part Number=BC847BS
Q9: library part Q_Dual_PNP_PNP_E1B1C2E2B2C1, Manufacturer="Yangzhou Yangjie", Part Number=BC857BS
R1 R2 R72 R115 R116 R117 R132 R137: library part R, Manufacturer=Yageo, Part Number=RC0201JR-07470RL, Substitution="any equivalent"
R3 R11 R18 R61: library part R, Manufacturer=Yageo, Part Number=RC0201FR-0722K6L, Substitution="any equivalent"
R4: library part R, Manufacturer=Yageo, Part Number=RC0201FR-0751KL, Tolerance=±1%, Substitution="any equivalent"
R5 R7 R36 R37 R40 R44 R48 R49 R50 R52 R59 R62 R63 R64 R66 R67 R68 R75 R85 R93 R100 R104 R105 R113 R120: library part R, Manufacturer=Yageo, Part Number=RC0402JR-0710KL, Substitution="any equivalent"
R6 R21 R29 R127 R140 R141 R143 R145 R148: library part R, Manufacturer=Yageo, Part Number=RC0201JR-07100RL, Substitution="any equivalent"
R8 R9 R10 R13 R149 R150: library part R, Manufacturer=Yageo, Part Number=RC0201JR-070RL, Substitution="any equivalent"
R12 R19 R23 R30 R31 R32 R34 R41 R84 R108 R139 R142: library part R, Manufacturer=Yageo, Part Number=RC0201JR-0733RL, Substitution="any equivalent"
R14 R15 R16 R17 R118 R119: library part R
R20 R38 R46 R47 R55: library part R, Manufacturer=Yageo, Part Number=RC0402FR-07180KL, Tolerance=±1%, Substitution="any equivalent"
R22 R57 R81 R83 R86 R87: library part R, Manufacturer=Yageo, Part Number=RC0201JR-0733KL, Substitution="any equivalent"
R24 R35 R94 R96 R98 R114 R129 R133 R138 R144 R151 R153 R154: library part R, Manufacturer=Yageo, Part Number=RC0201FR-071KL, Substitution="any equivalent"
R25: library part R, Manufacturer=Yageo, Part Number=RC0201JR-07750RL, Substitution="any equivalent"
R26: library part R, Manufacturer=Yageo, Part Number=RC0201JR-071K2L, Substitution="any equivalent"
R27 R28 R45 R53: library part R, Manufacturer=Yageo, Part Number=RC0402JR-071K8L, Substitution="any equivalent"
R33 R123 R155: library part R, Manufacturer=Yageo, Part Number=RC0201JR-0710RL, Substitution="any equivalent"
R39: library part R, Manufacturer=Yageo, Part Number=RC0402FR-0737K4L, Tolerance=±1%, Substitution="any equivalent"
R42 R43 R124 R128 R130 R131 R136 R146 R147: library part R, Manufacturer=Yageo, Part Number=RC0201JR-07220RL, Substitution="any equivalent"
R51 R54 R74 R76 R92 R95 R97 R99 R103 R106 R107 R109 R126: library part R, Manufacturer=Yageo, Part Number=RC0201FR-074K7L, Substitution="any equivalent"
R56: library part R, Manufacturer=Yageo, Part Number=RC0402FR-07820KL, Tolerance=±1%, Substitution="any equivalent"
R58 R70: library part R, Manufacturer=Yageo, Part Number=RC0402FR-07820KL, Substitution="any equivalent"
R60 R71 R79 R80: library part R, Manufacturer=Yageo, Part Number=RC0402JR-075K1L, Substitution="any equivalent"
R65 R82: library part R, Manufacturer=Yageo, Part Number=RC0402JR-0718KL, Substitution="any equivalent"
R69 R121: library part R, Manufacturer=Yageo, Part Number=RC0201FR-0712KL, Tolerance=±1%, Substitution="any equivalent"
R73: library part R, Manufacturer=Yageo, Part Number=RC0402JR-073KL, Substitution="any equivalent"
R77 R78: library part R, Manufacturer=Yageo, Part Number=RC0201JR-072K2L, Substitution="any equivalent"
R88 R89 R90 R91: library part R, Manufacturer=Yageo, Part Number=RC0402FR-0718K7L, Tolerance=±1%, Substitution="any equivalent"
R101: library part R, Manufacturer=Yageo, Part Number=RC0402FR-07100KL, Tolerance=±1%, Substitution="any equivalent"
R102 R110 R111 R112 R156 R157: library part R, Manufacturer=Yageo, Part Number=RC0201JR-07330RL, Substitution="any equivalent"
R122: library part R, Manufacturer=Yageo, Part Number=RC0201FR-074K7L, Tolerance=±1%, Substitution="any equivalent"
R125 R135: library part R, Manufacturer=Yageo, Part Number=RC0201FR-0712KL, Substitution="any equivalent"
R134: library part R, Manufacturer=Yageo, Part Number=RC0201JR-07180RL, Substitution="any equivalent"
R152: library part R, Manufacturer=Yageo, Part Number=RC0201JR-073RL, Substitution="any equivalent"
RN1 RN2 RN3 RN4 RN5 RN6 RN7 RN8: library part R_Pack04, Manufacturer=Yageo, Part Number=YC124-JR-07100RL, Substitution="any equivalent"
SW1 SW2: library part SW_Push_Shielded, Manufacturer="TE Connectivity", Part Number=FSMRA3JH
T1 T2: library part BALUN-B0310J50100AHF, Manufacturer=TTM, Part Number=B0310J50100AHF
T3 T4: library part TFSZ06052460-3310A2X, Manufacturer=TDK, Part Number=TFSZ06052460-3310A2X
TP6: Manufacturer=Ronghe, Part Number=RH-5001
U1 U2: Manufacturer=Maxscend, Part Number=MXD8546F
U3 U8 U34 U35: library part GT4227QA, Manufacturer=GTIC, Part Number=GT4227QA
U4: Manufacturer=RFMD, Part Number=RFFC5072TR7, Substitution=RFFC5072*
U5 U6 U7: library part BGS12P2L6, Manufacturer="Shenzhen Fuman", Part Number=FM8625H
U9 U12 U14: library part MXD8638, Manufacturer=Maxscend, Part Number=MXD8638C
U10 U11 U13 U36: Manufacturer=UMW, Part Number=SN74LVC1G86DCKR, Substitution="TI SN74LVC1G86DCKR"
U15: library part D3V3XA4B10LP, Manufacturer="TECH PUBLIC", Part Number=TPAZ1143-04F
U16: library part ICE40UP5K-SG48ITR, Manufacturer=Lattice, Part Number=ICE40UP5K-SG48ITR
U17: Manufacturer=Maxim, Part Number=MAX2831ETM+T, Substitution=MAX2831ETM+
U18: library part MAX5864, Manufacturer=Maxim, Part Number=MAX5865ETM+T, Substitution=MAX5865ETM+
U19: library part Si5351C-B-GM, Manufacturer="Silicon Laboratories Inc", Part Number=SI5351C-B-GM, Substitution=SI5351C-B-GM*
U20: library part W25Q32JVSS, Manufacturer=Winbond, Part Number=W25Q32JVSSIQ
U21: Manufacturer="Texas Instruments", Part Number=TPS62410DRCR
U22 U32: library part XC6206PxxxMR, Manufacturer=UMW, Part Number=XC6206P252MR
U23: library part LPC43xxFET180, Manufacturer=NXP, Part Number=LPC4330FET180, Substitution=LPC4350FET180
U24 U28: library part BD2243G, Manufacturer="Diodes Inc.", Part Number=AP22652W6-7
U25: library part TRF37A73, Manufacturer="Texas Instruments", Part Number=TRF37C73IDSGR, Substitution=TRF37C73*
U26: Manufacturer=Nexperia, Part Number=74HC00BQ,115
U27: Manufacturer=UMW, Part Number=SN74LVC1G32DCKR, Substitution="TI SN74LVC1G32DCKR"
U30 U31 U37: library part NC7SB3157P6X, Manufacturer=UMW, Part Number=ET3157, Substitution="SN74LVC1G3157DCKR, TI SN74LVC1G3157DCKR"
U33: Manufacturer=Nexperia, Part Number=74HC4051BQ,115
U38 U40: Manufacturer=Infineon, Part Number=BGB741L7ESDE6327XTSA1
U39: Manufacturer=UMW, Part Number=SN74LVC1G08DCKR, Substitution="TI SN74LVC1G08DCKR"
X1: library part TG2520SMN-xx.xxxxxxMhz-xxxxNM, Manufacturer=HCI, Part Number=8122S-25.000NQ33FTL
X2: library part GSG-XTAL4PIN, Manufacturer="Shenzhen SCTF Electronics", Part Number=SX3B12.000F1210F30
X3: library part Crystal, Manufacturer=YXC, Part Number=XKXGI-SUA-32.768K

## Via types
v1: diameter 0.45, hole 0.3, F.Cu to B.Cu, tented both sides, 751 vias
v2: diameter 0.4, hole 0.3, F.Cu to B.Cu, tented both sides, 119 vias
v3: diameter 0.7, hole 0.4, F.Cu to B.Cu, tented both sides, 83 vias

## Nets (pads, with @x,y where several pads share a name; then routed paths per layer and width w, separated by ;. In a path a pad name is that pad's centre, name@x,y a point inside that pad or via, vN(x,y) a via of type N, cw(c..) or ccw(c..) an arc to the next point about the centre after c; other vN are vias at no path point)
1V2_EN: R54.2 U21.9 U23.J1 | length 57.5
  F.Cu w0.127: U23.J1@150.8,51.02 150.8,51.42 149.95,52.27 149.95,61.17 153.14,64.36 153.14,69.2 154.03,70.09 154.03,70.688 156.142,72.8 157.6,72.8 158.51,73.71 158.51,82.13 159.68,83.3 159.68,91.9 160.2,92.42 165.3,92.42 165.98,91.74 R54.2@165.98,89.02 165.9,88.94 165.9,87.92 166,87.82 U21.9@166,87.195
1V2FPGA: C117.1 C178.1 C179.1 C184.1 C196.1 C205.1 FB6.2 FB7.2 TP22.1 U16.5 U16.30 | length 11.7
  F.Cu w0.25: U16.5@134.65,58.983 134.65,57.97 C179.1@134.71,57.91 ; C178.1@135.49,66.93 135.65,66.77 U16.30@135.65,65.857
  F.Cu w0.35: v1(134.21,57.88) 134.23,57.86 134.66,57.86 C179.1@134.71,57.91 ; v1(134.99,66.96) 135.01,66.98 135.44,66.98 C178.1@135.49,66.93
  F.Cu w0.364: C196.1@138.98,67.07 139,67.05 v1(139,66.57) ; C205.1@139.23,57.92 139.25,57.94 v1(139.25,58.42)
  F.Cu w0.45: C117.1@134.2,70.87 134.55,70.87 v1(135.2,70.22) 135.962,70.22 FB6.2@136,70.257 ; v1(147.4,69.52) 148.05,70.17 C184.1@148.05,70.52 ; v1(147.4,71.52) 148.05,70.87 C184.1@148.05,70.52 ; FB7.2@149.6,69.732 148.838,69.732 C184.1@148.05,70.52
  B.Cu w0.45: v1(147.4,71.52) TP22.1@148.3,71.52
2V5FPGA: C177.1 FB8.2 U16.24 | length 2.3
  F.Cu w0.25: U16.24@138.837,65.17 139.21,65.17 139.28,65.1 C177.1@139.9,65.1
  F.Cu w0.35: C177.1@139.9,65.1 139.92,65.12 140.712,65.12 FB8.2@141.013,65.42
2V5RF: C7.1 C8.1 C10.1 C17.1 C21.1 C23.1 C24.1 C26.1 C27.1 C30.1 C31.1 C60.1 C66.1 C95.1 Q1.4 TP3.1 U1.1 U2.1 U5.4 U6.4 U7.4 U9.7 U10.5 U11.5 U12.7 U14.7 U26.1 U26.4 U26.14 U27.5 U32.2 | length 22.5
  F.Cu w0.127: v1(111.25,28.32) U26.4@112.012,28.32 ; U26.1@112.95,29.757 112.95,30.31 113.07,30.43 113.45,30.43
  F.Cu w0.25: U14.7@76.45,34.52 77,33.97 C66.1@77.13,33.97 ; C60.1@81.57,35.87 81.7,35.87 U12.7@82.25,35.32 ; U9.7@87.4,34.52 87.95,33.97 C31.1@88.08,33.97 ; U1.1@88.5,43.12 89.38,43.12 C10.1@89.48,43.02 ; U6.4@88.7,46.72 89.2,46.72 v1(89.45,46.97) ; C8.1@89.43,46.47 C8.1@89.45,46.45 ; C17.1@93.72,44.77 U7.4@94.4,44.77 ; U5.4@94.65,53.02 C7.1@94.65,53.7 ; C21.1@94.8,31.34 U2.1@94.8,32.32 ; U26.14@113.45,29.757 113.45,30.43 113.45,30.69 C24.1@113.53,30.77
  F.Cu w0.364: v1(75.45,29.92) 75.45,30.4 C95.1@75.47,30.42 Q1.4@75.47,31.16 ; C66.1@77.13,33.97 77.15,33.95 v2(77.15,33.47) ; v2(81.55,36.37) 81.55,35.89 C60.1@81.57,35.87 ; C26.1@85.3,27.4 85.32,27.42 v1(85.8,27.42) 85.85,27.37 U11.5@86.35,27.37 ; C31.1@88.08,33.97 88.1,33.95 v2(88.1,33.47) ; C30.1@89.3,27.4 89.32,27.42 v1(89.8,27.42) 89.85,27.37 U27.5@90.35,27.37 ; C8.1@89.43,46.47 89.45,46.49 v1(89.45,46.97) ; C10.1@89.48,43.02 89.5,43 v1(89.5,42.52) ; v1(93.2,44.67) 93.68,44.67 C17.1@93.7,44.69 ; C27.1@93.3,27.4 93.32,27.42 v1(93.8,27.42) 93.85,27.37 U10.5@94.35,27.37 ; v1(94.15,53.72) 94.63,53.72 C7.1@94.65,53.7 ; v1(94.3,31.32) 94.78,31.32 C21.1@94.8,31.34 ; C24.1@113.53,30.77 113.55,30.79 v1(113.55,31.27)
  F.Cu w0.45: U32.2@72.438,47.07 72.65,47.07 v1(73.3,46.42) 73.48,46.6 C23.1@73.9,46.6 74.32,46.6 v1(74.5,46.42)
  B.Cu w0.45: v1(74.5,46.42) TP3.1@75.6,46.42
3V3AUX: C32.1 P20.3 P22.11 P28.1 TP17.1 U28.6 | length 2.8
  F.Cu w0.364: U28.6@161.52,26.82 161.82,27.12 C32.1@162.62,27.12 162.8,26.94 v1(162.8,26.52)
  B.Cu w0.45: TP17.1@161.9,26.52 v1(162.8,26.52)
3V3CLK: C113.1 C119.1 C120.1 C121.1 C122.1 C167.1 C168.2 C199.1 FB2.2 R104.1 R105.1 TP16.1 U19.10 U19.11 U19.14 U19.18 U19.20 U37.5 X1.4 | length 20.3
  F.Cu w0.127: v1(125.4,27.42) R104.1@125.4,28.11 ; v1(129.8,32.22) 129.81,32.21 R105.1@129.81,31.52
  F.Cu w0.25: v1(122.44,32.57) 122.79,32.22 U19.18@123.75,32.22 ; C113.1@122.6,30.6 123.22,31.22 U19.20@123.75,31.22 ; C122.1@125.08,35.32 125.2,35.2 U19.14@125.2,34.17 ; U19.11@126.7,34.17 126.7,35.1 C119.1@126.92,35.32 ; U19.10@127.65,33.22 128.68,33.22 C120.1@128.8,33.34
  F.Cu w0.35: C199.1@127.2,28.14 127.22,28.12 U37.5@128.35,28.12
  F.Cu w0.364: v1(122,30.41) 122.1,30.51 122.51,30.51 C113.1@122.6,30.6 ; v1(124.89,35.92) 124.99,35.82 124.99,35.41 C122.1@125.08,35.32 ; C119.1@126.92,35.32 127.01,35.41 127.01,35.82 v1(127.11,35.92) ; C120.1@128.89,33.43 129.3,33.43 v1(129.4,33.53)
  F.Cu w0.45: v1(121.29,29.72) 121.48,29.53 C168.2@121.48,29.12 121.48,27.89 X1.4@121.55,27.82 ; v1(122.44,32.57) 122.58,32.43 122.58,32.02 C121.1@122.63,31.97 ; v1(126.6,28.32) 126.75,28.17 127.17,28.17 C199.1@127.2,28.14 ; v1(127.7,40.42) 128.35,41.07 C167.1@128.7,41.07 ; FB2.2@129.487,42.62 129.488,41.858 C167.1@128.7,41.07 ; v1(129.7,40.42) 129.05,41.07 C167.1@128.7,41.07
  B.Cu w0.45: v1(129.7,40.42) TP16.1@130.6,40.42
3V3FPGA: C123.1 C140.1 C148.1 C149.1 C150.1 C166.1 C173.1 C174.1 C181.1 C182.1 C183.1 C185.1 C186.1 C187.1 C197.1 FB2.1 FB4.2 R44.2 R45.2 R76.2 TP2.1 U16.1 U16.22 U16.33 U18.18 U22.3 | length 77.3
  F.Cu w0.127: R76.2@63.62,65.72 65.82,63.52 99.9,63.52 101,64.62 C140.1@101.52,64.62 ; v1(135.41,55.61) 135.41,55.62 R45.2@135.9,56.11 ; v1(142.01,60.46) R44.2@142.01,61.12
  F.Cu w0.25: U18.18@110.85,55.07 111.83,55.07 C123.1@111.9,55.14 ; v1(132.36,58.42) 132.65,58.71 U16.1@132.65,58.983 ; C148.1@133.92,66.93 133.92,66.472 134.15,66.242 U16.33@134.15,65.857 ; U16.22@138.837,64.17 139.81,64.17 C149.1@139.91,64.27
  F.Cu w0.35: C123.1@111.9,55.14 112.37,55.14 v1(112.4,55.11) ; C174.1@130.1,60.84 130.15,60.79 130.58,60.79 v1(130.6,60.81) ; v1(132.36,58.42) 132.38,58.4 132.38,57.99 C150.1@132.43,57.94 ; v1(133.42,66.99) 133.43,66.98 133.87,66.98 C148.1@133.92,66.93 ; C149.1@139.91,64.27 139.96,64.22 139.96,63.79 v1(139.94,63.77) ; v1(140.6,59.81) 140.62,59.79 141.05,59.79 C183.1@141.1,59.84
  F.Cu w0.364: v1(111.6,60.32) 111.6,60.8 C187.1@111.62,60.82 ; v1(130,65.77) 130,66.25 C185.1@130.02,66.27
  F.Cu w0.45: C140.1@101.52,64.62 101.57,64.57 101.57,64.16 v1(101.71,64.02) ; v1(115.4,54.52) 116.05,55.17 C186.1@116.4,55.17 116.75,55.17 v1(117.4,54.52) ; v1(127.3,61.12) 127.95,60.47 C197.1@128.3,60.47 128.65,60.47 v1(129.3,61.12) ; v1(127.7,44.82) 128.35,44.17 C166.1@128.7,44.17 ; FB2.1@127.913,42.62 127.913,43.382 C166.1@128.7,44.17 ; v1(129.7,44.82) 129.05,44.17 C166.1@128.7,44.17 ; C173.1@139.5,71.3 141.543,71.3 U22.3@141.7,71.457 141.857,71.3 143.62,71.3 145.9,69.02 v1(145.9,68.72) 146.55,68.07 C181.1@146.55,67.72 ; v1(145.9,64.72) 146.55,65.37 C182.1@146.55,65.72 ; C182.1@146.55,65.72 146.55,66.07 v1(145.9,66.72) 146.55,67.37 C181.1@146.55,67.72 ; C182.1@146.55,65.72 147.837,67.007 FB4.2@148.2,67.007 147.488,67.72 C181.1@146.55,67.72
  B.Cu w0.45: TP2.1@145.2,65.72 145.9,66.42 v1(145.9,66.72)
3V3LED: C80.1 C81.1 C110.1 C124.1 C163.1 C170.1 FB5.2 Q3.2 R11.1 R49.1 R50.2 R72.2 R73.2 R74.2 R75.2 R125.2 SW1.2 TP15.1 | length 22.6
  F.Cu w0.127: R74.2@63.62,48.52 63.62,49.76 C124.1@63.78,49.92 ; R72.2@63.62,56.52 R125.2@63.62,57.72 63.62,58.86 C81.1@63.78,59.02 ; C110.1@63.78,54.52 63.78,53.15 R73.2@63.81,53.12 ; R50.2@63.81,79.12 R75.2@63.81,78.12 63.9,78.21 v1(65.8,78.21) ; v1(67.4,76.72) R49.1@67.4,77.41 ; R11.1@75.78,68.17 75.78,67.19 C163.1@76.1,66.87
  F.Cu w0.45: v1(63.59,50.52) 63.73,50.38 63.73,49.97 C124.1@63.78,49.92 ; v1(63.59,55.12) 63.73,54.98 63.73,54.57 C110.1@63.78,54.52 ; v1(63.59,59.62) 63.73,59.48 63.73,59.07 C81.1@63.78,59.02 ; v1(65.8,78.21) 65.94,78.35 66.35,78.35 C80.1@66.4,78.4 ; v1(75.1,66.22) 75.75,66.87 C163.1@76.1,66.87 76.45,66.87 v1(77.1,66.22) 77.73,66.22 78.05,66.54 Q3.2@78.05,66.757 ; v1(93.8,64.52) 94.45,65.17 C170.1@94.45,65.52 ; v1(93.8,66.52) 94.45,65.87 C170.1@94.45,65.52 ; FB5.2@96,64.732 95.238,64.732 C170.1@94.45,65.52
  B.Cu w0.45: v1(93.8,64.52) TP15.1@94.8,64.52
!VAA_ENABLE: R60.2 U23.G4 | length 96.5
  F.Cu w0.127: v1(77.55,68.17) R60.2@78.24,68.17 ; v2(152,49.02) U23.G4@152.4,48.62
  In4.Cu w0.127: v1(77.55,68.17) 80.43,71.05 139.19,71.05 140.18,70.06 140.18,69.73 144.41,65.5 144.41,63.02 145.04,62.39 151.88,62.39 152.72,61.55 152.72,61.25 153.3,60.67 153.3,52.28 152.4,51.38 152.4,49.42 v2(152,49.02)
+1V2: C125.1 C126.1 C127.1 C172.1 FB7.1 L10.2 R47.1 R53.1 TP18.1 | length 13.1
  F.Cu w0.127: R53.1@151.8,68.63 v1(151.8,69.52) ; R47.1@161.69,82.02 161.69,82.53 C125.1@162.08,82.92 162.2,83.04 v1(162.2,83.52)
  F.Cu w0.45: FB7.1@149.6,71.307 150.363,71.308 C172.1@151.15,70.52 ; v1(151.8,69.52) 151.15,70.17 C172.1@151.15,70.52 ; v1(151.8,71.52) 151.15,70.87 C172.1@151.15,70.52 ; v1(160.2,86.02) 160.916,86.736 161.2,86.736 161.484,86.736 v1(162.2,86.02) 162.916,86.736 163.2,86.736 163.484,86.736 v1(164.2,86.02)
  B.Cu w0.45: v1(162.2,86.02) TP18.1@162.2,86.92
+2V5: C175.1 FB8.1 TP1.1 U22.2 | length 5.8
  F.Cu w0.45: FB8.1@142.587,65.42 142.65,65.483 C175.1@142.65,67.22 U22.2@142.65,69.182 v1(142.65,70.32)
  B.Cu w0.45: TP1.1@142.6,71.22 142.65,71.17 v1(142.65,70.32)
+5V: C147.1 FB1.1 R52.1 U21.3 | length 5.7
  F.Cu w0.127: FB1.1@168.2,82.707 168.2,82.6 168.98,81.82 168.98,81.59 169.25,81.32 R52.1@169.69,81.32
  F.Cu w0.25: U21.3@166.5,84.22 166.5,82.67 C147.1@166.65,82.52
  F.Cu w0.8: C147.1@166.65,82.52 166.837,82.708 FB1.1@168.2,82.707
AA_BYPASS_I+: U34.4 U35.7 | length 4.3
  F.Cu w0.203: U34.4@107.3,46.301 107.3,45.879 107.311,45.868 107.311,43.392 107.611,43.092 107.611,42.572 107.6,42.561 U35.7@107.6,42.139
AA_BYPASS_I-: U34.5 U35.6 | length 4.3
  F.Cu w0.203: U34.5@107.7,46.301 107.7,45.879 107.689,45.868 107.689,43.548 107.989,43.248 107.989,42.572 108,42.561 U35.6@108,42.139
AA_BYPASS_Q+: U3.6 U8.5 | length 4.3
  F.Cu w0.203: U8.5@113.3,46.301 113.3,45.879 113.289,45.868 113.289,43.548 113.589,43.248 113.589,42.572 113.6,42.561 U3.6@113.6,42.139
AA_BYPASS_Q-: U3.7 U8.4 | length 4.3
  F.Cu w0.203: U8.4@112.9,46.301 112.9,45.879 112.911,45.868 112.911,43.392 113.211,43.092 113.211,42.572 113.2,42.561 U3.7@113.2,42.139
AA_EN: TP55.1 U8.10 U23.K7 U34.10 U36.2 | length 56.8
  F.Cu w0.127: v1(106.79,48.66) 106.9,48.55 U34.10@106.9,47.838 ; v1(112.39,48.66) 112.5,48.55 U8.10@112.5,47.838 ; v1(115.83,40.48) 115.83,39.46 116.22,39.07 U36.2@116.35,39.07 ; v2(149.6,45.82) U23.K7@150,46.22
  In4.Cu w0.127: v1(106.79,48.66) v1(112.39,48.66) 114.16,48.66 116.65,46.17 116.65,41.3 ; v1(115.83,40.48) 116.65,41.3 ; v2(149.6,45.82) 149.46,45.82 148.8,45.16 140.3,45.16 137.81,42.67 127.71,42.67 126.34,41.3 116.65,41.3
  B.Cu w0.127: TP55.1@105.8,48.62 105.84,48.66 v1(106.79,48.66)
ADC0_0: P20.20 U23.B6 U23.C5 | length 30.2
  F.Cu w0.127: U23.C5@155.6,47.82 U23.B6@156.4,47.02 156.8,46.62 160.056,46.62 161.516,48.08 162.155,48.08 162.774,48.699 162.774,51.374 165.43,54.03 171.18,54.03 171.75,54.6 171.75,61.31 170.49,62.57 P20.20@170.49,62.73
ADC0_2: P20.16 U23.B3 U23.C2 | length 20.7
  F.Cu w0.127: U23.C2@155.6,50.22 v2(156,50.62) ; U23.B3@156.4,49.42 156.52,49.42 156.92,49.82 157.97,49.82 v1(158.46,50.31) 159.89,50.31 160.22,50.64 161.31,50.64 168.32,57.65 P20.16@170.49,57.65
  In4.Cu w0.127: v2(156,50.62) 156.02,50.64 158.13,50.64 v1(158.46,50.31)
ADC0_3: R38.2 R39.1 U23.B4 | length 5.2
  F.Cu w0.127: U23.B4@156.4,48.62 156.8,49.02 R39.1@160.39,49.02 R38.2@160.39,50.02
ADC0_4: R106.1 R157.1 U23.A5 | length 18
  F.Cu w0.127: U23.A5@157.2,47.82 v2(157.6,48.22) ; R106.1@165.05,58.6 165.08,58.57 R157.1@165.78,58.57 165.8,58.55 v1(165.8,57.87)
  In4.Cu w0.127: v2(157.6,48.22) 158.85,48.22 162.65,52.02 165.63,52.02 166.31,52.7 166.31,55.28 165.8,55.79 v1(165.8,57.87)
ADC0_5: P20.18 U23.A1 U23.C3 | length 19.7
  F.Cu w0.127: U23.C3@155.6,49.42 156,49.82 156.552,49.82 156.8,50.068 156.8,50.372 157.12,50.692 157.12,50.94 U23.A1@157.2,51.02 158.45,52.27 162.57,52.27 P20.18@170.49,60.19
ADC0_6: P20.14 U23.A4 U23.D6 | length 25.4
  F.Cu w0.127: U23.D6@154.8,47.02 v2(155.2,46.62) ; U23.A4@157.2,48.62 159.835,48.62 160.115,48.34 v1(160.6,48.34) 162.056,48.34 162.52,48.804 162.52,51.48 166.15,55.11 P20.14@170.49,55.11
  In4.Cu w0.127: v2(155.2,46.62) 155.36,46.62 155.76,46.22 156.21,46.22 156.71,46.72 160.1,46.72 160.6,47.22 v1(160.6,48.34)
ADC0_7: R103.1 R156.1 U23.B5 | length 19
  F.Cu w0.127: U23.B5@156.4,47.82 v2(156.8,48.22) ; R156.1@163.62,58.57 164.32,58.57 R103.1@164.35,58.6 v1(164.35,57.87)
  In4.Cu w0.127: v2(156.8,48.22) 157.59,49.01 159.28,49.01 162.55,52.28 165.52,52.28 166.05,52.81 166.05,54.4 166.05,55.17 164.35,56.87 v1(164.35,57.87)
AFE_CLK: R31.1 TP29.1 U16.35 U18.6 | length 58.7
  F.Cu w0.127: U18.6@107.15,51.87 107.15,51.18 v1(107.21,51.12) ; R31.1@124.68,36.52 122.07,36.52 119.87,38.72 v1(119.87,49.12) 119.87,59.71 121.64,61.48 125.85,61.48 v1(127.85,63.48) ; v1(132.5,66.72) 132.59,66.72 133.15,66.16 U16.35@133.15,65.857
  In4.Cu w0.127: v1(107.21,51.12) 116.9,51.12 118.9,49.12 v1(119.87,49.12) ; v1(127.85,63.48) 129.26,63.48 v1(132.5,66.72)
  B.Cu w0.127: TP29.1@131.8,66.02 v1(132.5,66.72)